# Altium PCB PCB1.PcbDoc
Units mil, origin at the board's own origin, x right, y up, seen from the top; angles counter-clockwise.
Board outline 1968.5 x 984.25 mil, 2 copper layers (Top Layer, Bottom Layer); 14 components, 14 nets, 39 pads, 0 vias.
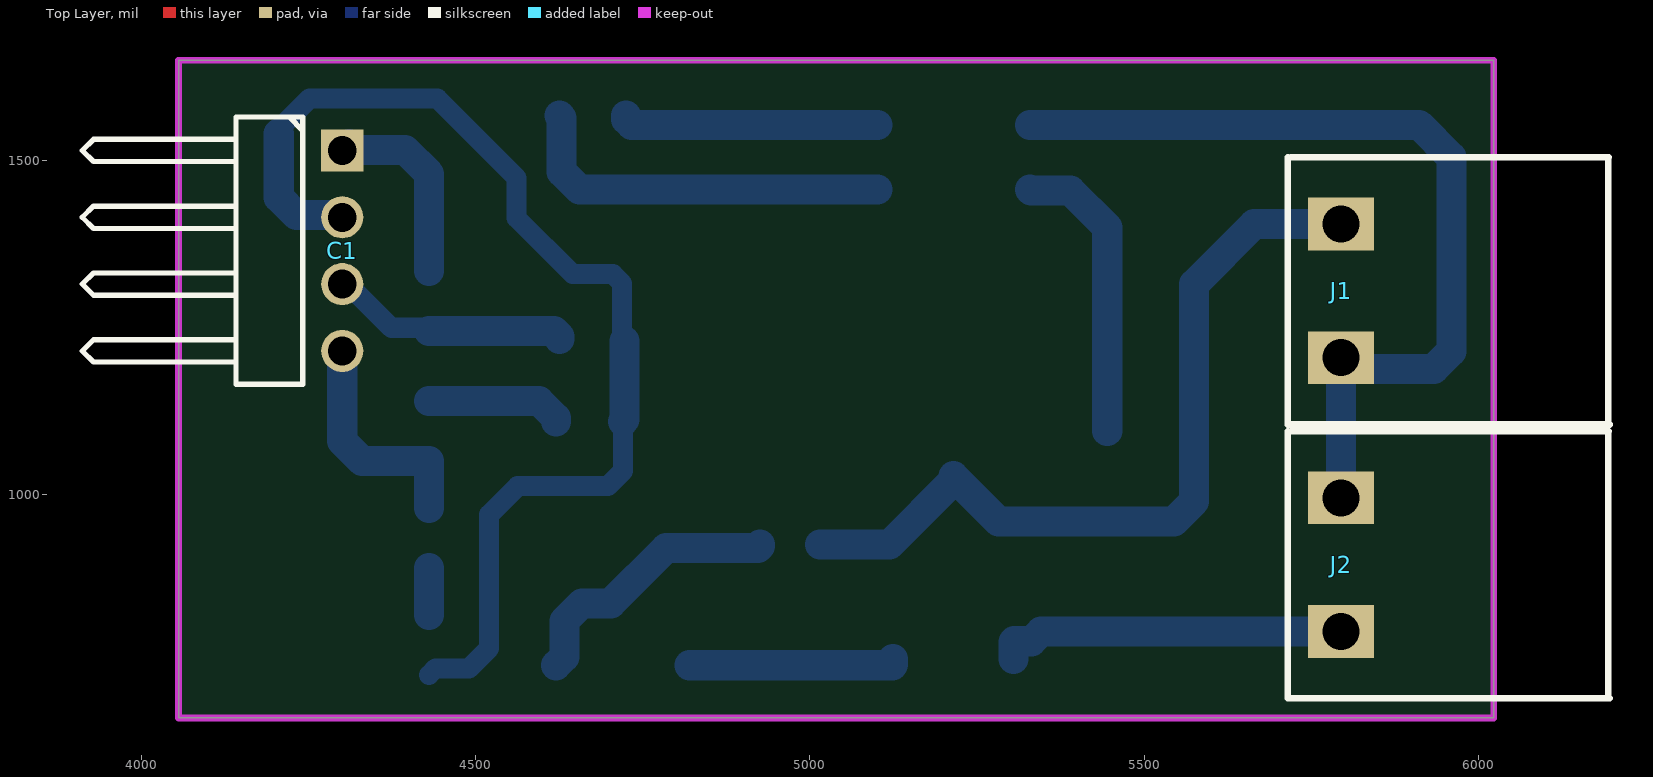
[diagram p0: Top Layer view]
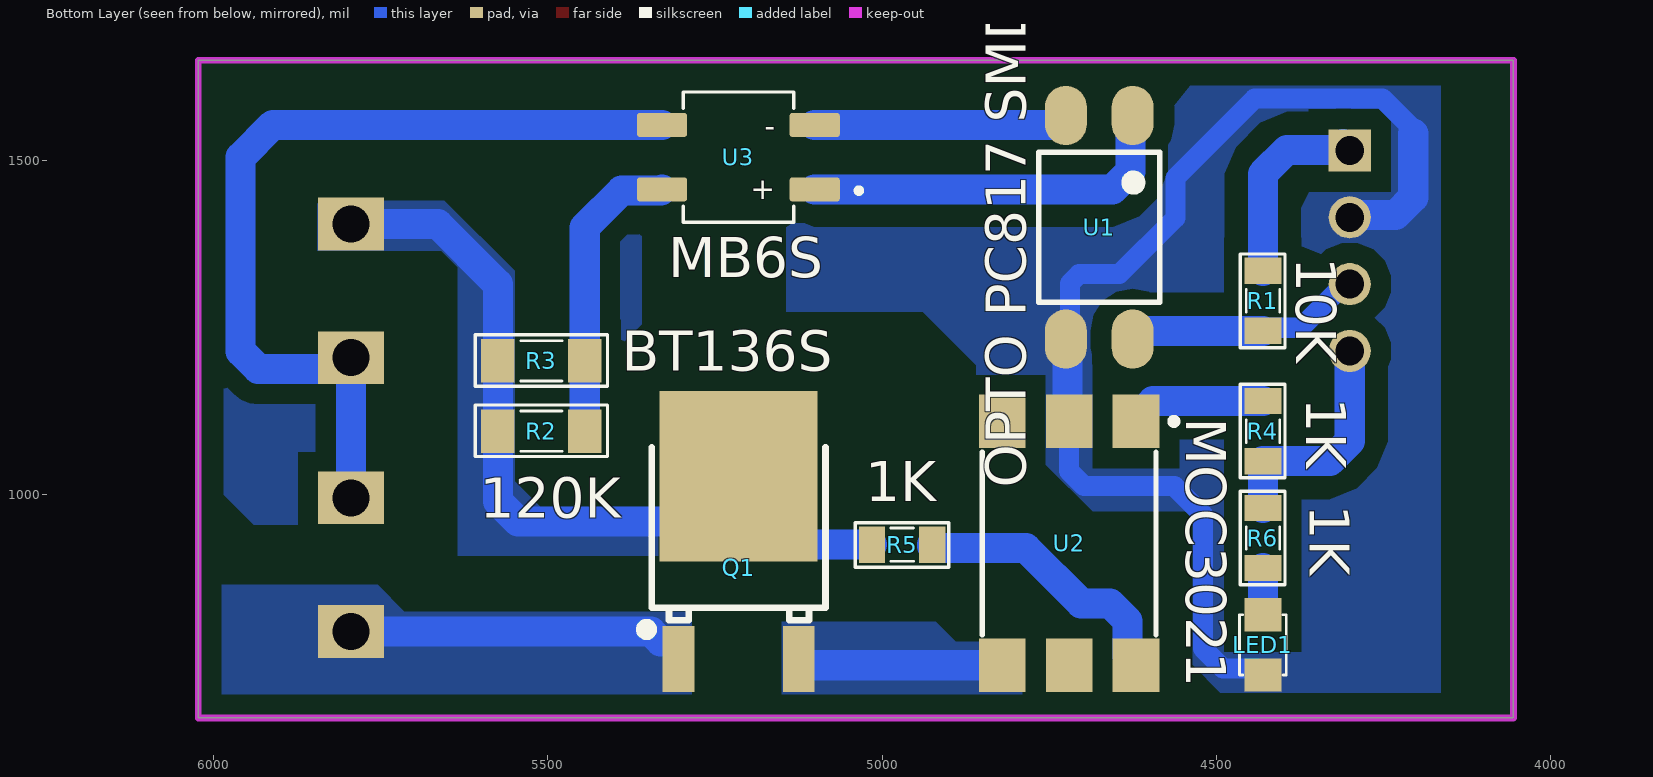
[diagram p1: Bottom Layer view, seen from below]

## Layer stack, top to bottom
Top Solder: solder mask 0.4, Solder Resist, Dk 3.5
Top Layer: signal copper 1.4
Dielectric 1: dielectric 12.6, FR-4, Dk 4.8
Bottom Layer: signal copper 1.4
Bottom Solder: solder mask 0.4, Solder Resist, Dk 3.5

## Board outline
4055,665.75 4055,1650 6023.5,1650 6023.5,665.75

## Design rules (kind name [scope] priority, off if disabled: settings)
Clearance [All] p1: gap=30 ignorepadtopadclearanceinfootprint=FALSE
PolygonConnect [All] p1: connectstyle=Direct reliefconductorwidth=10 reliefentries=4 polygonreliefangle="90 Angle" airgapwidth=10
RoutingVias [All] p1: holewidth=28 width=50 viastyle="Through Hole" minholewidth=28 minwidth=50 maxholewidth=28 maxwidth=50
SolderMaskExpansion [All] p1: expansion=4 istentingtop=FALSE
Width [All] p1: maxlimit=80 minlimit=30 preferedwidth=45
30 further rules are at their usual default settings.

## Components (designator, comment, footprint, x,y, rotation, side; value= is the part's Value field where it differs from the comment)
C1 "JP4" JP4-D1C 4200,1165 r270 top
J1 "AC IN" "CON 2 2EDG5.08" 5795,1405 r270 top
J2 "AC OUT" "CON 2 2EDG5.08" 5795,995 r270 top
LED1 "LED" LED-0805-Red 4430,820 r270 bottom value="LED 3 - 5 ly 2 Colour"
Q1 "BT136S" TO-252-3_L6.6-W6.1-P4.57-LS9.9-BR-CW 5220,930 r270 bottom
R1 "10K" RES-SMD-0805 4430,1290 r270 bottom
R2 "120K" RES-SMD-1206 5510,1095 r180 bottom
R3 "120K" RES-SMD-1206 5510,1200 r180 bottom
R4 "1K" RES-SMD-0805 4430,1095 r270 bottom
R5 "1K" RES-SMD-0805 4970,925 r180 bottom
R6 "1K" RES-SMD-0805 4430,935 r270 bottom
U1 "OPTO PC817 SMD" SOP4 4675,1400 r270 bottom value=PC817
U2 "MOC3021" SO6 4720,927.09 r0 bottom
U3 "MB6S" TO269AA 5215,1505 r0 bottom

## Footprints (in the part's own frame and the unit in brackets; to place one, negate y for a bottom-side part, rotate by r counter-clockwise, add the part's x,y. Pads: shape width x height; smd on the part's side, far side on the other; paste and mask are expansions set on the pad)
"CON 2 2EDG5.08" [mm]
  rect 2x2.5 hole 1.4: 1(0,0) 2(5.08,0)
  silkscreen extent -2.54,-2.03 7.62,10.21, body extent -2.5,-1.75 7.58,10.25, height 3.15
JP4-D1C [mm] "4 pins, 1 row, right angled, gold plating"
  rect 1.6x1.6 hole 1.1: 1(-8.89,2.54)
  round 1.6 hole 1.1: 2(-6.35,2.54) 3(-3.81,2.54) 4(-1.27,2.54)
  silkscreen extent -10.16,-7.34 0,1.04, body extent -10.16,-7.57 0,2.79, height 2.54
LED-0805-Red [mil]
  rect 50x55 smd: 1(0,0) 2(90,0)
  silkscreen extent 0,-35 90,35, body extent 5,-25 85,25, height 43
RES-SMD-0805 [mil]
  rect 39.37x55 smd: 1(-45,0) 2(45,0)
  silkscreen extent -70,-34 70,33, body extent -39,-25 39,25, height 31
RES-SMD-1206 [mil]
  rect 50x65 smd: 1(-65,0) 2(65,0)
  silkscreen extent -99,-38 99,39, body extent -63,-31 63,32, height 40
SO6 [mil]
  rect 70x80 smd: 1(-100,-182.48) 2(0,-182.48) 3(100,-182.48) 5(0,182.48) 6(-100,182.48)
  rect 70x80 smd mask+0: 4(100,182.48)
  silkscreen extent -162,-187 130,137, body extent -138,-212 138,211, height 141
SOP4 [mm]
  oval 2.25x1.6 smd: 1(-4.25,1.27) 2(-4.25,-1.27) 3(4.25,-1.27) 4(4.25,1.27)
  silkscreen extent -2.85,-2.3 2.85,2.3, body extent -4.67,-2.29 4.93,2.31, height 3.6
TO269AA [mm]
  rrect23% 1.91x0.91 smd: 1(-2.9,1.225) 2(-2.9,-1.225) 3(2.9,-1.225) 4(2.9,1.225)
  silkscreen extent -4.68,-2.48 2.1,2.48, body extent -3.57,-2.44 3.47,2.51, height 2.7
TO-252-3_L6.6-W6.1-P4.57-LS9.9-BR-CW [mm]
  rect 2.5x1.2 smd: 1(4.475,-2.149) 3(4.475,2.423)
  rect 6.5x6 smd: 2(-2.475,0.137)
  silkscreen extent -3.57,-3.56 3.55,3.44, body extent -4.23,-3.29 5.47,3.29, height 2.32

## Part data
C1: "WR-PHD 2.54 mm Angled Socket Header", Manufacturer="W¨¹rth Elektronik eiSos GmbH", partNo=613004143121, ComponentLink1 Description=Manufacturer, ComponentLink1URL=http://www.we-online.com, ComponentLink2 Description=Datasheet, ComponentLink2URL=http://katalog.we-online.de/em/datasheet/6130xx143121.pdf, Created by="Karrer Zheng", Created Date="29 March 2013", NoPins=04
J1 J2: library part "CON 2", "CON2 KF terminal"
LED1: library part "LED SMD"
Q1: library part BT136-800E_C2901010
R1 R2 R3 R4 R5 R6: library part Res-SMD, "Resistor", Manufacturer="Generic Components", Class=Passive, Published=08/06/2000, Publisher="Altium Hobart Technology Centre"
U1 U2: "Single Opto"
U3: "Bridge Rectifier"

## Nets (pads, with @x,y where several pads share a name; then routed paths per layer and width w, separated by ;. In a path a pad name is that pad's centre, name@x,y a point inside that pad or via, vN(x,y) a via of type N, cw(c..) or ccw(c..) an arc to the next point about the centre after c; other vN are vias at no path point)
+5: C1.1 R1.1 | length 283.6
  Bottom Layer w45: C1.1@4310,1525 4319,1516 4394,1516 4430,1480 R1.1
DIM: C1.4 R4.2 R6.1 | length 347.4
  Bottom Layer w45: C1.4 4300,1080 4330,1050 R4.2 R6.1
GND: C1.2 LED1.2 U1.3 U2.2 | length 1708.8
  Bottom Layer w30: 4205,1540 4205,1546.63 4250.87,1592.5 4442.5,1592.5 4560.94,1474.06 4560.94,1414.06 4645,1330 4704.93,1330 4718.69,1316.24 4718.69,1233.99 U1.3@4722.5,1230.18 ; LED1.2 4440,740 4490,740 4520,770 4520,970 4562.5,1012.5 4697.5,1012.5 4720,1035 U2.2
  Bottom Layer w45: 4205,1540 4205,1444.8 4231.36,1418.44 4296.56,1418.44 C1.2 ; U2.2 4722.5,1112.07 U1.3@4722.5,1230.18
NetJ1_1: J1.1 Q1.2 R2.1 R3.1 R5.1 | length 1229.1
  Bottom Layer w45: R5.1 5119.02,925 5214.63,1020.61 Q1.2 5282.07,960 5545,960 5575,990 R2.1 R3.1 5575,1315 5665,1405 J1.1
NetJ1_2: J1.2 J2.1 U3.3 | length 1334.2
  Bottom Layer w45: U3.3 5911.77,1553.23 5960,1505 5960,1214.49 5933.64,1188.13 5811.87,1188.13 J1.2 J2.1
NetJ2_2: J2.2 Q1.1 | length 522.4
  Bottom Layer w45: Q1.1 5304.63,779.41 5305.75,780.53 5331.34,780.53 5345.81,795 J2.2
NetLED1_1: LED1.1 R6.2 | length 70
  Bottom Layer w45: LED1.1 R6.2
NetQ1_3: Q1.3 U2.4 | length 313.2
  Bottom Layer w45: U2.4 5123.5,744.61 5124.63,745.73 Q1.3
NetR2_2: R2.2 R3.2 U3.4 | length 444.3
  Bottom Layer w45: U3.4 5330.94,1455 5390,1455 5445,1400 R3.2 R2.2
NetR4_1: R4.1 U2.1 | length 205.5
  Bottom Layer w45: R4.1 4594.57,1140 4620,1114.57 U2.1
NetR5_2: R5.2 U2.6 | length 412.4
  Bottom Layer w45: U2.6 4632.5,757.11 4632.5,810.75 4658.86,837.11 4702.11,837.11 4785,920 4922.19,920 4925,922.81 R5.2
NetU1_1: U1.1 U3.1 | length 568.9
  Bottom Layer w45: U1.1 4628.44,1563.88 4628.44,1483.13 4654.8,1456.77 U3.1
NetU1_2: U1.2 U3.2 | length 385.1
  Bottom Layer w45: U1.2 4725,1561.54 4733.31,1553.23 U3.2
ZC: C1.3 R1.2 U1.4 | length 361.5
  Bottom Layer w30: C1.3 4308.18,1315 4373.5,1249.69 4425.31,1249.69 R1.2
  Bottom Layer w45: R1.2 4616.69,1245 4625,1236.69 U1.4
pads on no net: U2.3 U2.5

## Polygon pours and split planes (outlines as drawn)
no net on Bottom Layer "NONET_L02_P006" (solid, pour order 6): 5360,1590 5360,1520 5885,1520 5925,1480 5925,1255 5910,1240 5750,1240 5750,955 5940,955 5985,1000 5985,1510 5905,1590
no net on Bottom Layer "NONET_L02_P005" (solid, pour order 5): 5360,1390 5360,1255 5415,1200 5415,1060 5470,1060 5470,1385
GND on Bottom Layer "GND_L02_P000" (solid, pour order 0): 4163.75,1653.75 4163.75,668.75 4458.75,668.75 4535,745 4535,975 4685,975 4758.75,1048.75 4858.75,1048.75 4858.75,1193.75 4938.75,1273.75 5143.75,1273.75 5143.75,1653.75
NetJ2_2 on Bottom Layer "NETJ2_2_L02_P001" (solid, pour order 1): 5285,825 5715,825 5755,865 5995,865 5995,700 5285,700
NetQ1_3 on Bottom Layer "NETQ1_3_L02_P002" (solid, pour order 2): 4790,780 4890,780 4920,810 5150,810 5150,700 4790,700
NetJ1_1 on Bottom Layer "NETJ1_1_L02_P004" (solid, pour order 4): 5335,908.27 5635,908.27 5635,1340 5660,1365 5845,1365 5845,1435 5840,1440 5655,1440 5550,1335 5550,1020 5510,980 5335,980

## Keep-outs
Keep-Out Layer:
  the board outline again, w10

## Text inside footprints (layer, text, board x,y; h text height)
U3: Bottom Overlay "-" at 5159.9,1560.1 h32.06 r180; Bottom Overlay "+" at 5159.93,1469.96 h32.04 r180